# EAGLE board DSKY (EAGLE 9.6.2)
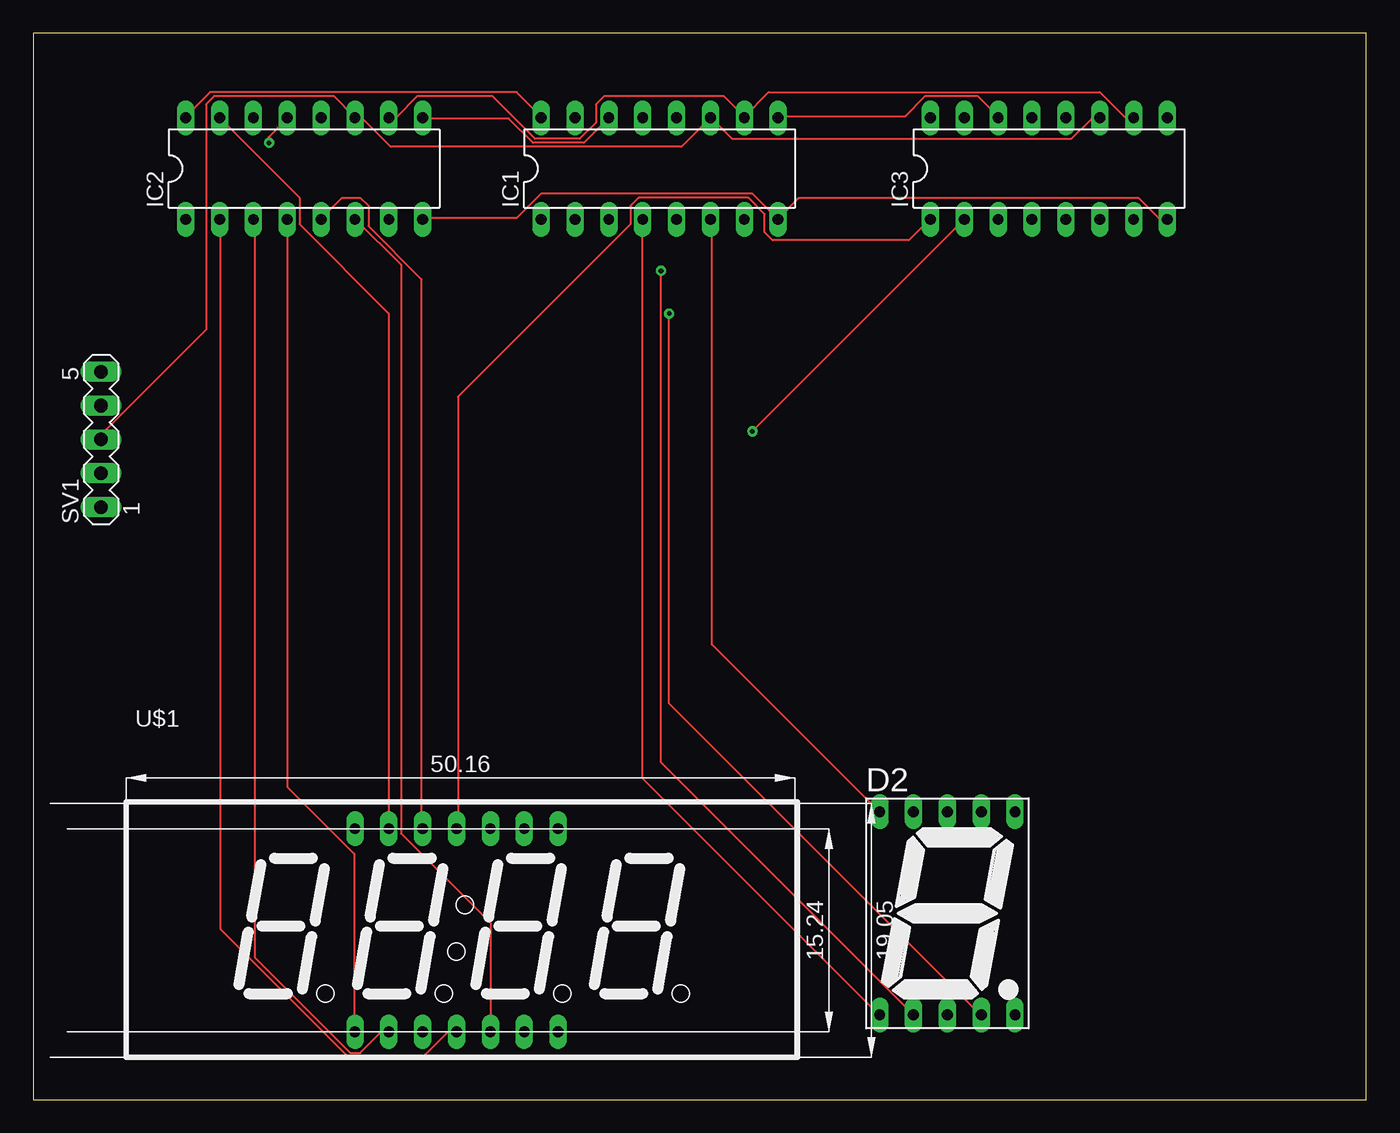
[diagram p0: board, top side]
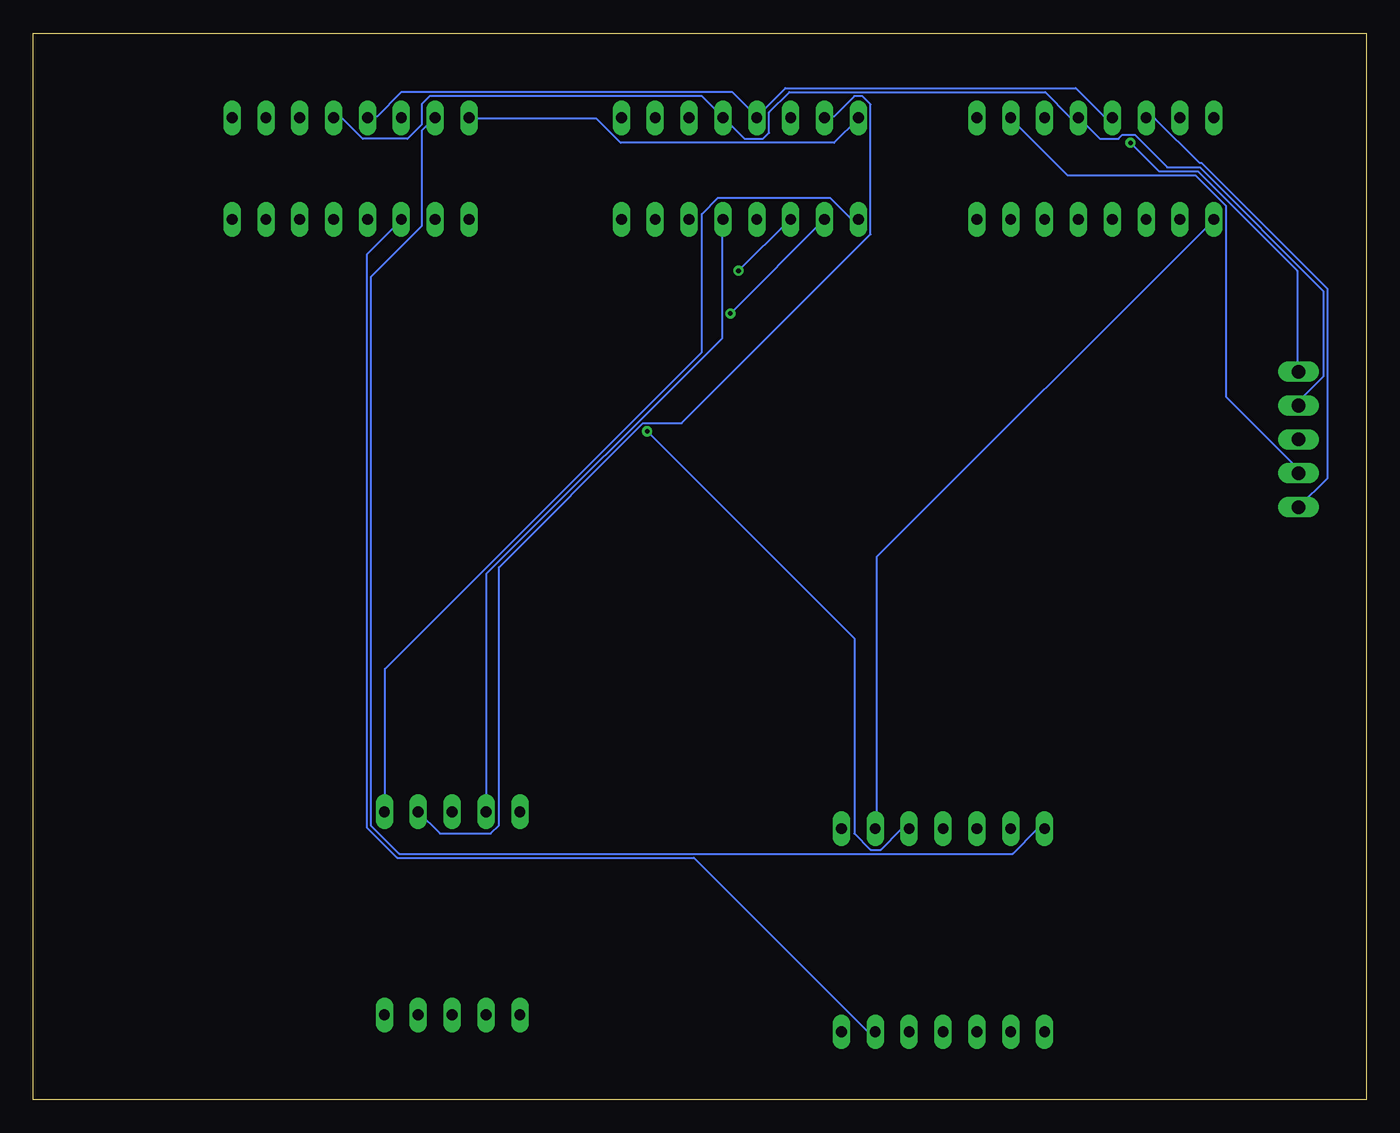
[diagram p1: board, bottom side, seen from below]

Size 100 x 80 mm. Coordinates in mm from the lower left corner, seen from the top.
Outline: 0,0 100,0 100,80 0,80 0,0
Copper layers (1*16): Top 0.035mm / dielectric 1.5mm / Bottom 0.035mm
Design rules "default": minimum track width 6mil, minimum drill 0.35mm, track to track 6mil, track to pad 6mil, pad to pad 6mil, via to via 6mil, smd to smd 6mil, copper to edge 40mil, drill to drill 6mil, minimum pad ring 10mil, minimum via ring 8mil, stop-mask expansion 4mil, vias tented up to drill 0mil, thermal gap 10mil

## Footprints (pad centres in the part's own frame; a part is rotated, then mirrored left to right if it is on the bottom)
7SEG-13 = drill 0.813 long: 1 -5.08,-7.62; 2 -2.54,-7.62; 3 0,-7.62; 4 2.54,-7.62; 5 5.08,-7.62; 6 5.08,7.62; 7 2.54,7.62; 8 0,7.62; 9 -2.54,7.62; 10 -5.08,7.62
DIL16 = drill 0.813 long: 1 -8.89,-3.81; 2 -6.35,-3.81; 3 -3.81,-3.81; 4 -1.27,-3.81; 5 1.27,-3.81; 6 3.81,-3.81; 7 6.35,-3.81; 8 8.89,-3.81; 9 8.89,3.81; 10 6.35,3.81; 11 3.81,3.81; 12 1.27,3.81; 13 -1.27,3.81; 14 -3.81,3.81; 15 -6.35,3.81; 16 -8.89,3.81
MA05-1 = drill 1.016 long: 1 -5.08,0; 2 -2.54,0; 3 0,0; 4 2.54,0; 5 5.08,0
4DIG_7SEG_056 = drill 0.8 long: 1 -2.54,-11.43; 2 0,-11.43; 3 2.54,-11.43; 4 5.08,-11.43; 5 7.62,-11.43; 6 10.16,-11.43; 7 12.7,-11.43; 8 12.7,3.81; 9 10.16,3.81; 10 7.62,3.81; 11 5.08,3.81; 12 2.54,3.81; 13 0,3.81; 14 -2.54,3.81

## Placement (x,y rotation side)
D2  [7SEG-13]  68.58,13.97 0 top
IC1  74LS595N  [DIL16]  46.99,69.85 0 top
IC2  74LS595N  [DIL16]  20.32,69.85 0 top
IC3  74LS595N  [DIL16]  76.2,69.85 0 top
SV1  [MA05-1]  5.08,49.53 90 top
U$1  4DIG_7SEG_056  [4DIG_7SEG_056]  26.67,16.51 0 top

## Library data of the parts
D2 = special
IC1-IC3 = 74xx-us
SV1 = con-lstb; OC_FARNELL: unknown; OC_NEWARK: unknown
U$1 = 7-seg-disp

## Nets
GND: IC1.8 IC2.8 IC3.8
N$1: IC2.15 U$1.13
N$2: IC2.1 U$1.9
N$3: IC2.2 U$1.4
N$4: IC2.3 U$1.2
N$5: IC2.4 U$1.1
N$6: IC2.5 U$1.12
N$7: IC2.6 U$1.5
N$8: D2.7 IC1.15
N$9: D2.6 IC1.1
N$10: D2.4 IC1.2
N$11: D2.2 IC1.3
N$12: D2.1 IC1.4
N$13: D2.9 IC1.5
N$14: D2.10 IC1.6
N$15: IC3.15 U$1.14
N$16: IC3.1 U$1.11
N$17: IC3.2 U$1.10
N$18: IC3.3 U$1.6
N$19: IC1.13 IC2.13 IC3.13 SV1.5
N$20: IC1.14 IC2.9
N$21: IC1.9 IC3.14
N$22: IC1.12 IC2.12 IC3.12 SV1.4
N$23: IC1.11 IC2.11 IC3.11 SV1.3
N$24: IC1.10 IC2.10 IC3.10 SV1.2
N$25: IC2.14 SV1.1
VCC: IC1.16 IC2.16 IC3.16

## Tracks (layer width: path | path; a pad name or v marks a point on that pad's centre or on a via)
GND
  Top 0.152: IC2.8 29.26,66.14 36.27,66.14 38.1,67.97 53.95,67.97 IC1.8 55.93,66.14 57.45,67.67 82.91,67.67 84.43,66.14 85.04,66.14 IC3.8
N$1
  Top 0.152: U$1.13 26.67,58.98 19.96,65.68 19.96,67.67 IC2.15
N$2
  Bottom 0.152: U$1.9 36.73,20.42 36.73,40.69 11.43,65.99 IC2.1
N$3
  Top 0.152: U$1.4 31.7,5.03 31.09,5.03 29.26,3.2 23.62,3.2 14.02,12.8 14.02,65.99 IC2.2
N$4
  Top 0.152: U$1.2 26.67,5.03 26.06,5.03 24.54,3.5 23.77,3.5 16.61,10.67 16.61,65.99 IC2.3
N$5
  Top 0.152: IC2.4 19.05,23.47 24.08,18.44 24.08,5.18 U$1.1
N$6
  Top 0.152: U$1.12 29.11,20.42 29.11,61.57 25.15,65.53 25.15,67.06 24.54,67.67 23.16,67.67 21.64,66.14 IC2.5
N$7
  Top 0.152: U$1.5 34.29,13.26 27.58,19.96 27.58,62.64 24.23,65.99 IC2.6
N$8
  Bottom 0.152: D2.7 69.49,19.96 65.68,19.96 65.08,20.57 65.08,39.93 54.25,50.75 51.36,50.75 37.19,64.92 37.19,74.68 37.8,75.29 38.41,75.29 39.93,73.76 40.54,73.76 IC1.15
N$9
  Bottom 0.152: IC1.1 38.1,66.14 38.71,66.14 40.23,67.67 48.62,67.67 49.84,66.45 49.84,56.08 73.61,32.31 73.61,21.64 D2.6
N$10  (via drill 0.35)
  Top 0.152: v47.7,58.98 47.7,29.72 71.02,6.4 D2.4
  Bottom 0.152: v47.7,58.98 IC1.2
N$11  (via drill 0.35)
  Top 0.152: v47.09,62.18 47.09,25.3 D2.2
  Bottom 0.152: v47.09,62.18 43.28,65.99 IC1.3
N$12
  Top 0.152: IC1.4 45.72,24.08 63.4,6.4 D2.1
N$13
  Bottom 0.152: IC1.5 48.31,65.99 48.31,57.15 65.99,39.47 65.99,21.64 D2.9
N$14
  Top 0.152: IC1.6 50.9,65.99 50.9,34.14 63.4,21.64 D2.10
N$15
  Bottom 0.152: U$1.14 24.23,20.27 24.69,20.27 26.52,18.44 72.54,18.44 74.68,20.57 74.68,61.72 70.87,65.53 70.87,72.69 69.95,73.61 IC3.15
N$16
  Top 0.152: U$1.11 31.85,20.42 31.85,52.73 44.81,65.68 44.81,67.06 45.41,67.67 53.65,67.67 54.86,66.45 54.86,65.08 55.47,64.47 65.68,64.47 67.21,65.99 IC3.1
N$17  (via drill 0.35)
  Top 0.152: IC3.2 v53.95,50.14
  Bottom 0.152: v53.95,50.14 38.41,34.59 38.41,19.96 37.19,18.75 36.42,18.75 34.9,20.27 34.29,20.27 U$1.10
N$18
  Bottom 0.152: U$1.6 36.88,5.18 37.49,5.18 50.44,18.14 72.69,18.14 74.98,20.42 74.98,63.4 72.39,65.99 IC3.3
N$19  (via drill 0.35)
  Top 0.152: v17.68,71.78 17.68,72.24 19.05,73.61 IC2.13
  Bottom 0.152: 45.72,73.76 43.59,75.89 21.79,75.89 19.66,73.76 19.05,73.76 IC2.13 | 45.72,73.76 47.55,75.59 72.39,75.59 74.22,73.76 74.83,73.76 IC3.13 | 45.72,73.76 IC1.13 | v17.68,71.78 15.54,69.65 12.65,69.65 5.18,62.18 5.18,54.71 SV1.5
N$20
  Top 0.152: IC1.14 41.3,71.78 37.49,71.78 35.66,73.61 29.26,73.61 IC2.9
N$21
  Top 0.152: IC1.9 55.93,73.76 65.38,73.76 66.9,75.29 70.87,75.29 72.39,73.76 IC3.14
N$22
  Bottom 0.152: IC3.12 77.42,73.61 76.81,73.61 75.29,72.08 71.93,72.08 70.87,73.15 70.87,74.68 70.26,75.29 49.84,75.29 48.31,73.76 IC1.12 48.16,73.61 46.63,72.08 45.26,72.08 44.81,72.54 44.81,74.07 43.28,75.59 24.08,75.59 22.25,73.76 21.64,73.76 IC2.12 21.49,73.61 19.96,72.08 18.59,72.08 18.29,72.39 17.37,72.39 14.94,69.95 12.5,69.95 3.2,60.66 3.2,54.25 5.03,52.43 5.03,52.12 SV1.4
N$23
  Top 0.152: IC3.11 80.01,73.61 79.4,73.61 77.88,72.08 52.43,72.08 50.9,73.61 IC1.11 48.62,71.48 26.82,71.48 24.69,73.61 24.23,73.61 IC2.11 24.08,73.76 22.55,75.29 13.56,75.29 12.95,74.68 12.95,57.76 5.18,49.99 5.18,49.53 SV1.3
N$24
  Top 0.152: 53.34,73.76 51.82,75.29 42.82,75.29 42.22,74.68 42.22,73.3 41,72.08 37.64,72.08 34.44,75.29 28.8,75.29 27.28,73.76 26.67,73.76 IC2.10 | 53.34,73.76 55.17,75.59 80.01,75.59 81.84,73.76 82.45,73.76 IC3.10 | 53.34,73.76 IC1.10
  Bottom 0.152: SV1.2 5.18,47.09 5.18,47.4 10.52,52.73 10.52,67.06 12.8,69.34 22.4,69.34 26.67,73.61 IC2.10
N$25
  Bottom 0.152: SV1.1 2.9,46.63 2.9,60.81 12.34,70.26 12.5,70.26 15.85,73.61 16.46,73.61 IC2.14
VCC
  Top 0.152: IC2.16 11.43,73.76 13.26,75.59 36.27,75.59 38.1,73.76 IC1.16
  Bottom 0.152: IC3.16 67.21,73.61 57.76,73.61 55.93,71.78 39.93,71.78 38.1,73.61 IC1.16